# EAGLE board Arm controller (EAGLE 9.2.1)
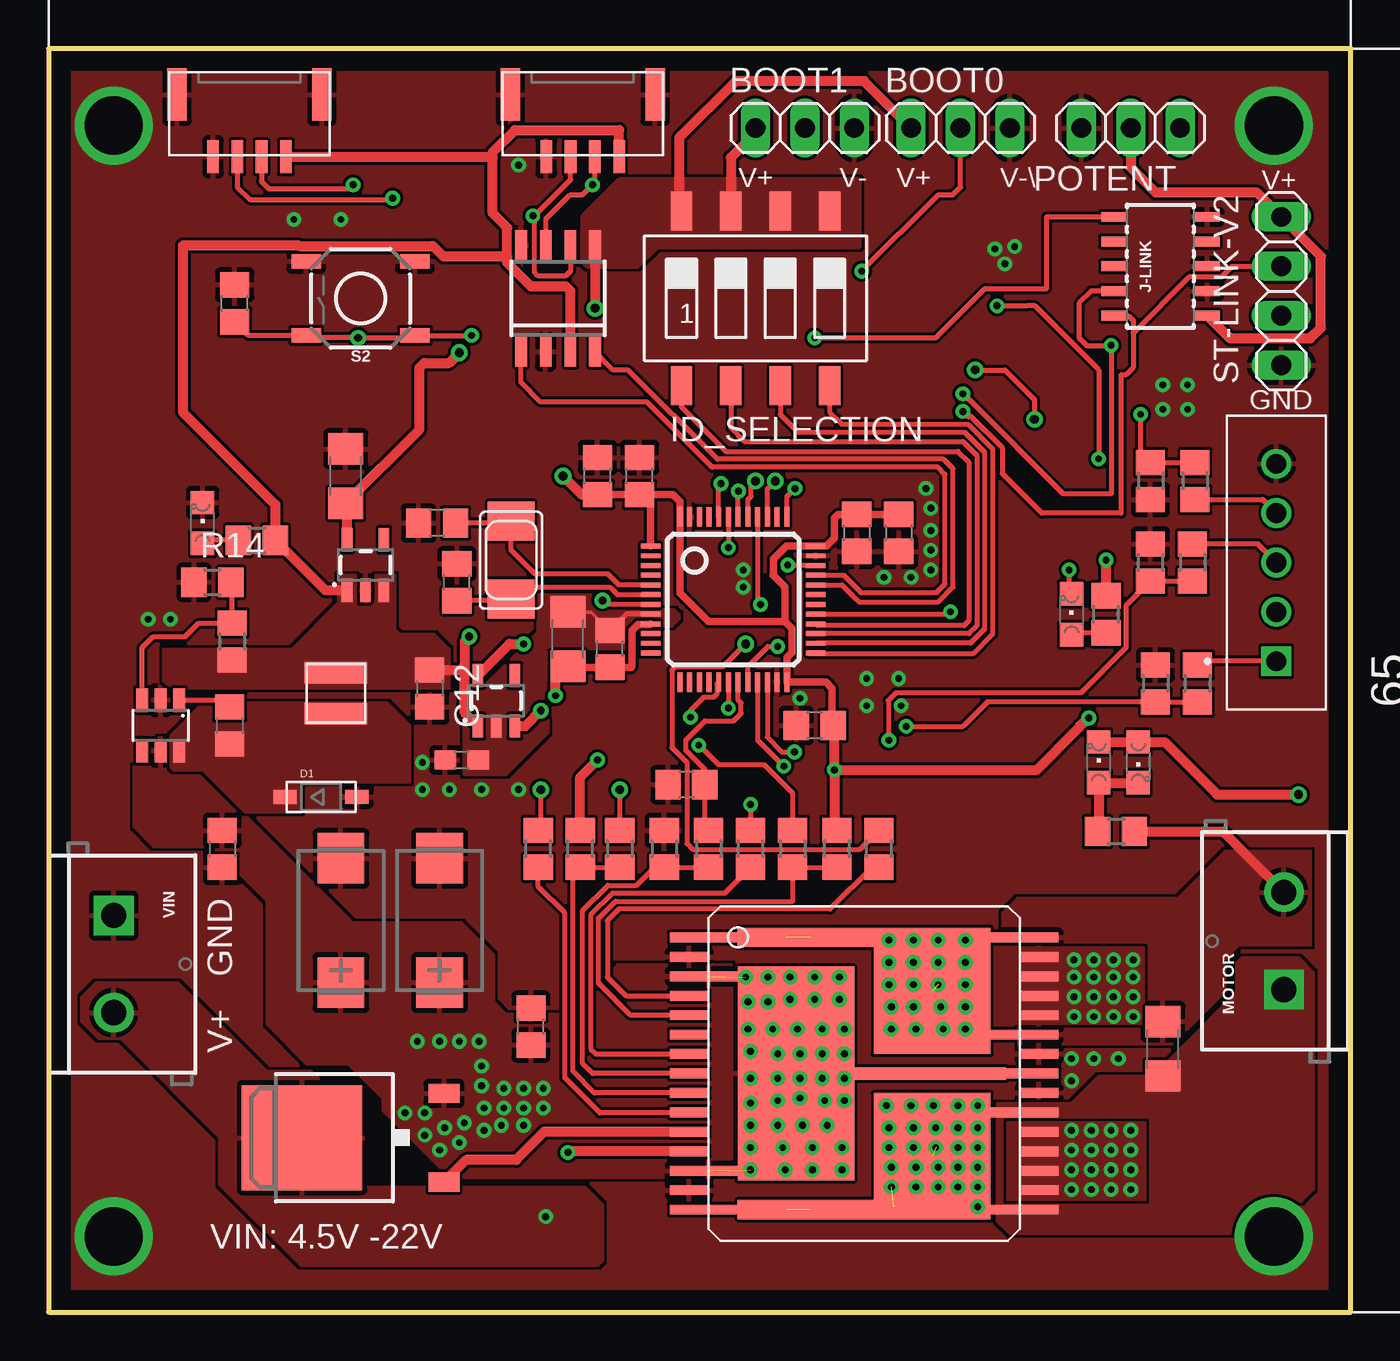
[diagram p0: board, top side]
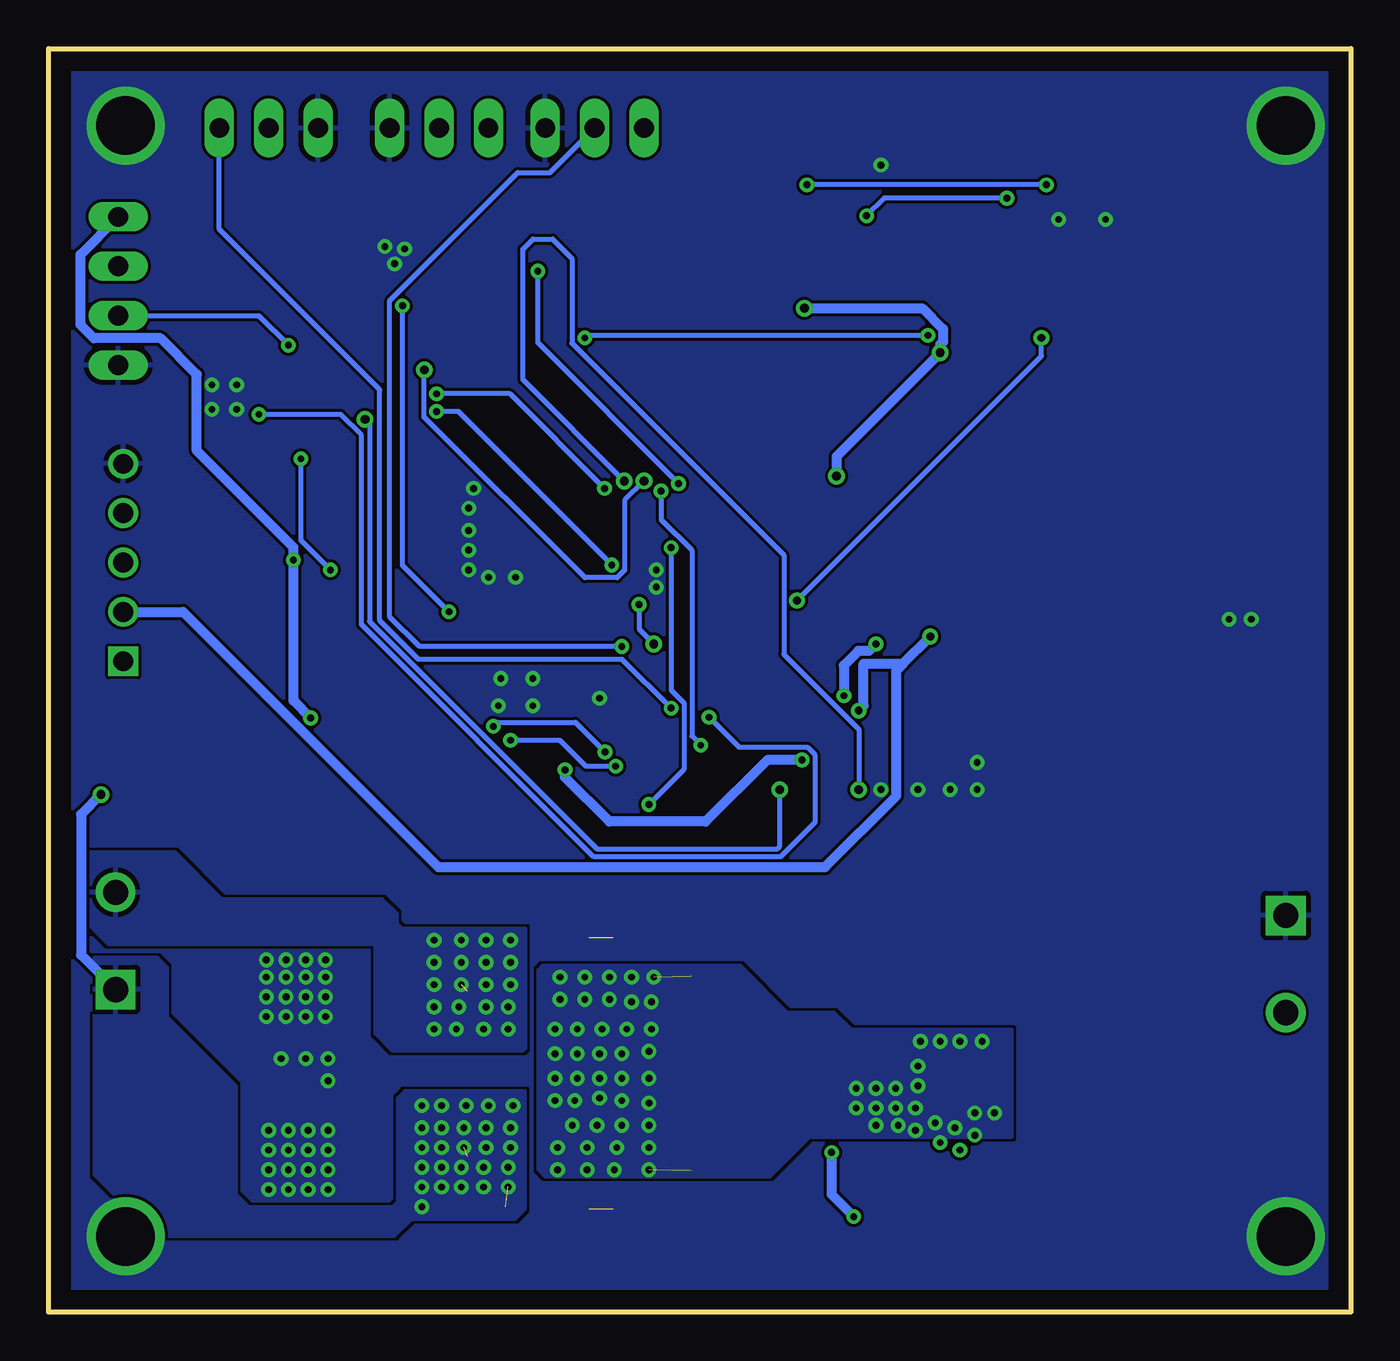
[diagram p1: board, bottom side, seen from below]

Size 67 x 65 mm. Coordinates in mm from the lower left corner, seen from the top.
Outline: 0,0 67,0 67,65 0,65 0,0
Copper layers (1*16): Top 0.035mm / dielectric 1.5mm / Bottom 0.035mm
Design rules "default *": minimum track width 6mil, minimum drill 0.35mm, track to track 6mil, track to pad 6mil, pad to pad 6mil, via to via 6mil, smd to smd 6mil, copper to edge 40mil, drill to drill 6mil, minimum pad ring 10mil, minimum via ring 8mil, stop-mask expansion 4mil, vias tented up to drill 15mil, thermal gap 10mil

## Footprints (pad centres in the part's own frame; a part is rotated, then mirrored left to right if it is on the bottom)
1X03 = drill 1.016 long: 1 -2.54,0; 2 0,0; 3 2.54,0
C0805 = smd 1.3 x 1.5: 1 -0.95,0; 2 0.95,0
C1206 = smd 1.6 x 1.8: 1 -1.4,0; 2 1.4,0
CT7343 = smd 2.6 x 2.4: + -3.2,0; - 3.2,0
SM04B-GHS-TB = smd 0.6 x 1.7: P$1 -1.875,0.85; P$2 -0.625,0.85; P$3 0.625,0.85; P$4 1.875,0.85 | smd 1 x 2.7: P$5 -3.725,-2.35; P$6 3.725,-2.35
SOD-123 = smd 1.2 x 0.7: A 1.85,0; C -1.85,0
0603 = smd 1.1 x 1: 1 -0.85,0; 2 0.85,0
SMS-004 = smd 1.092 x 2.007: 1 -3.81,-4.496; 2 -1.27,-4.496; 3 1.27,-4.496; 4 3.81,-4.496; 5 3.81,4.496; 6 1.27,4.496; 7 -1.27,4.496; 8 -3.81,4.496
TE_5-103669-4 = drill 1.02 square: 1 -5.08,0 | drill 1.02: 2 -2.54,0; 3 0,0; 4 2.54,0; 5 5.08,0
SAMTECH_FTSH-105-01 = smd 0.508 x 1.27: 1 -2.54,-2.413; 2 -2.54,2.413; 3 -1.27,-2.413; 4 -1.27,2.413; 5 0,-2.413; 6 0,2.413; 7 1.27,-2.413; 8 1.27,2.413; 9 2.54,-2.413; 10 2.54,2.413
CHIPLED_0805 = smd 1.2 x 1.2: A 0,-1.05; C 0,1.05
SCREWTERMINAL-5MM-2 = drill 1.3 pad 2.032 square: 1 0,0 | drill 1.3 pad 2.032: 2 5,0
R0805 = smd 1.3 x 1.5: 1 -0.95,0; 2 0.95,0
TACTILE_SWITCH_SMD_5.2MM = smd 1.524 x 0.762: 1 -2.794,1.905; 2 2.794,1.905; 3 -2.794,-1.905; 4 2.794,-1.905
1X04 = drill 1.016 long: 1 -3.81,0; 2 -1.27,0; 3 1.27,0; 4 3.81,0
SOT23-5 = smd 0.55 x 1.2: 1 -0.95,-1.3; 2 0,-1.3; 3 0.95,-1.3; 4 0.95,1.3; 5 -0.95,1.3
STM32_LQFP48 = smd 0.254 x 1: 1 -2.75,-4.25; 2 -2.25,-4.25; 3 -1.75,-4.25; 4 -1.25,-4.25; 5 -0.75,-4.25; 6 -0.25,-4.25; 7 0.25,-4.25; 8 0.75,-4.25; 9 1.25,-4.25; 10 1.75,-4.25; 11 2.25,-4.25; 12 2.75,-4.25; 25 2.75,4.25; 26 2.25,4.25; 27 1.75,4.25; 28 1.25,4.25; 29 0.75,4.25; 30 0.25,4.25; 31 -0.25,4.25; 32 -0.75,4.25; 33 -1.25,4.25; 34 -1.75,4.25; 35 -2.25,4.25; 36 -2.75,4.25 | smd 1 x 0.254: 13 4.25,-2.75; 14 4.25,-2.25; 15 4.25,-1.75; 16 4.25,-1.25; 17 4.25,-0.75; 18 4.25,-0.25; 19 4.25,0.25; 20 4.25,0.75; 21 4.25,1.25; 22 4.25,1.75; 23 4.25,2.25; 24 4.25,2.75; 37 -4.25,2.75; 38 -4.25,2.25; 39 -4.25,1.75; 40 -4.25,1.25; 41 -4.25,0.75; 42 -4.25,0.25; 43 -4.25,-0.25; 44 -4.25,-0.75; 45 -4.25,-1.25; 46 -4.25,-1.75; 47 -4.25,-2.25; 48 -4.25,-2.75
MULTIPOWERSO-30 = smd 0.508 x 12: 1 -7,-4; 15 7,-4; 16 7,4; 30 -7,4 | smd 0.508 x 2: 2 -6,-9; 4 -4,-9; 5 -3,-9; 6 -2,-9; 7 -1,-9; 8 0,-9; 9 1,-9; 10 2,-9; 11 3,-9; 12 4,-9; 14 6,-9; 17 6,9; 18 5,9; 19 4,9; 20 3,9; 22 1,9; 24 -1,9; 26 -3,9; 27 -4,9; 28 -5,9; 29 -6,9 | smd 0.508 x 4: 3 -5,-8; 13 5,-8; 21 2,8; 23 0,8; 25 -2,8 | smd 6.5 x 6: OUTA -4.25,3.5; OUTB 4.25,3.5 | smd 1 x 7.5: OUTA@1 -7,-2.755; OUTB@1 7,-2.755 | smd 11 x 6: VCC 0,-3.5 | smd 0.65 x 8.3: VCC@1 0,3.145
SOIC8 = smd 0.6 x 1.5: 1 -1.905,-2.75; 2 -0.635,-2.75; 3 0.635,-2.75; 4 1.905,-2.75; 5 1.905,2.75; 6 0.635,2.75; 7 -0.635,2.75; 8 -1.905,2.75
TO252-3 = smd 1 x 1.6: 1 -2.28,-6.07; 2 2.28,-6.07 | smd 5.4 x 6.2: 3 0,1.23
TSOT23-6 = smd 0.62 x 1.22: 1 -0.95,-1.3; 2 0,-1.3; 3 0.95,-1.3; 4 0.95,1.3; 5 0,1.3; 6 -0.95,1.3
3015 = smd 1.1 x 3.2: 1 -1.05,0; 2 1.05,0
NX5032 = smd 2 x 2.4: P$1 2,0; P$2 -2,0

## Placement (x,y rotation side)
BOOT0  [1X03]  46.91,60.91 0 top
BOOT1  [1X03]  38.91,60.91 0 top
C1  1uF  [C0805]  41.58,40.09 270 top
C2  1uF  [C0805]  43.74,40.09 270 top
C3  1uF  [C0805]  39.42,30.18 180 top
C4  1uF  [C0805]  28.24,43.01 90 top
C5  100nF  [C0805]  30.4,43.01 90 top
C6  20pF  [C0805]  19.99,40.59 180 top
C7  20pF  [C0805]  21,37.55 90 top
C8  100nF  [C1206]  57.33,13.54 90 top
C9  100nF  [C0805]  24.81,14.68 90 top
C10  10uF  [C1206]  15.29,43.01 90 top
C11  4.7uF  [C0805]  8.94,23.83 270 top
C12  10uF  [C0805]  19.61,32.08 270 top
C13  33nF  [C0805]  32.81,27.13 180 top
C14  10nF  [C0805]  9.32,30.18 270 top
C19  103pF  [C0805]  9.57,51.9 90 top
C20  10uF  [C1206]  26.72,34.62 90 top
C21  1uF  [C0805]  28.88,34.12 90 top
C22  [CT7343]  15.03,20.15 90 top
C23  [CT7343]  20.11,20.15 90 top
CON1  SM04B-GHS-TB  [SM04B-GHS-TB]  27.48,60.28 180 top
CON2  SM04B-GHS-TB  [SM04B-GHS-TB]  10.34,60.28 180 top
D1  [SOD-123]  14.02,26.5 0 top
FB1  30O/1.8A  [0603]  21.26,28.4 0 top
ID_SELECTION  SMS-004  [SMS-004]  36.37,52.15 0 top
J1  5-103669-4  [TE_5-103669-4]  63.17,38.56 90 top
J-LINK  CORTEX_DEBUG_SMD  [SAMTECH_FTSH-105-01]  57.2,53.8 90 top
LED1  [CHIPLED_0805]  54.02,28.27 0 top
LED2  [CHIPLED_0805]  56.05,28.27 180 top
LED3  [CHIPLED_0805]  7.92,40.59 0 top
LED4  [CHIPLED_0805]  52.63,35.89 0 top
MOTOR  [SCREWTERMINAL-5MM-2]  63.55,16.59 90 top
POTENT  [1X03]  55.67,60.91 180 top
R1  1k  [R0805]  10.72,39.7 0 top
R2  1k  [R0805]  31.67,23.83 270 top
R3  4.7k  [R0805]  27.35,23.83 90 top
R4  4.7k  [R0805]  40.56,23.83 90 top
R5  1k  [R0805]  42.72,23.83 90 top
R6  1k  [R0805]  25.19,23.83 90 top
R7  1k  [R0805]  38.27,23.83 270 top
R8  1k  [R0805]  29.38,23.83 270 top
R9  10k  [R0805]  54.91,24.72 180 top
R10  1k  [R0805]  36.12,23.83 90 top
R11  10k  [R0805]  33.96,23.83 270 top
R12  1k  [R0805]  54.4,35.89 90 top
R13  91k  [R0805]  9.45,34.5 270 top
R14  17k  [R0805]  8.43,37.55 0 top
R15  1k  [R0805]  59.1,32.34 270 top
R16  2k  [R0805]  56.94,32.34 270 top
R17  1k  [R0805]  58.85,38.56 270 top
R18  3.3k  [R0805]  56.69,38.56 90 top
R19  1k  [R0805]  58.98,42.75 270 top
R20  2k  [R0805]  56.69,42.75 270 top
S2  TAC_SWITCHSMD  [TACTILE_SWITCH_SMD_5.2MM]  16.05,52.15 180 top
ST-LINK-V2  [1X04]  63.42,52.53 90 top
U1  3.3V  [SOT23-5]  16.3,38.43 0 top
U2  3.3V  [SOT23-5]  23.04,31.45 0 top
U$1  STM32F103CBT6  [STM32_LQFP48]  35.23,36.66 270 top
U$2  VNH5019  [MULTIPOWERSO-30]  41.96,12.27 270 top
U$3  MCP2562-E/SN  [SOIC8]  26.21,52.15 0 top
U$4  MOSFET-NCH  [TO252-3]  14.27,8.97 90 top
U$7  RT6200  [TSOT23-6]  5.76,30.18 180 top
U$8  3015-INDUCTOR  [3015]  14.78,31.83 90 top
VIN  [SCREWTERMINAL-5MM-2]  3.35,20.4 270 top
X1  8MHz  [NX5032]  23.8,38.69 90 top

## Library data of the parts
BOOT0 BOOT1 POTENT ST-LINK-V2 = pinhead
C1-C7 C9 C11-C14 C19 C21-C23 = rcl; SPICEPREFIX: C
C8 C10 C20 = resistor
CON1 CON2 ID_SELECTION U$1-U$4 U$7 = SPEAR
D1 X1 = adafruit
FB1 = SPEAR; PROD_ID: NDUC-13805
J1 = SPEAR; AVAILABILITY: Unavailable; CENTERLINE_PITCH: 2.54 mm[.1 in]; COMMENT: 5-103669-4; DESCRIPTION: 05 MTE HDR SRST LATCH W/HLDWN; EU_ROHS_COMPLIANCE: Compliant; LINK: http://www.te.com/usa-en/product-5-103669-4.html; MF: TE Connectivity; MP: 5-103669-4; NUMBER_OF_POSITIONS: 5; PACKAGE: None; PRICE: None; PRODUCT_TYPE: Connector
J-LINK = SparkFun-Connectors
LED1-LED4 = led
MOTOR VIN = SparkFun-Connectors; SF_SKU: PRT-08432
R1-R20 = rcl; SPICEPREFIX: R
S2 = SPEAR; PROD_ID: SWCH-08247; SF_SKU: COM-08720
U1 U2 = SparkFun-IC-Power; PROD_ID: VREG-12457
U$8 = LCSC

## Nets
1: R4.1 R7.2 U$2.5
2: R3.1 R8.2 U$2.9
3.3V: BOOT0.1 BOOT1.1 C1.1 C2.1 C3.1 C4.1 C5.1 C10.1 ID_SELECTION.5 ID_SELECTION.6 ID_SELECTION.7 ID_SELECTION.8 J-LINK.1 POTENT.2 R3.2 R4.2 R12.2 ST-LINK-V2.4 U1.5 U$1.1 U$1.24 U$1.36 U$1.48 U$3.5
5V: C12.1 CON1.P$1 CON2.P$1 J1.2 R1.2 R13.2 U1.1 U1.3 U2.1 U2.3 U$3.3 U$8.2
A: R17.2 R18.1 U$1.21
AGND: C20.2 C21.2 FB1.2 U2.2 U$1.8
B: R15.2 R16.2 U$1.22
BOOT0: BOOT0.2 U$1.44
BOOT1: BOOT1.2 U$1.20
CAN_RX: U$1.32 U$3.4
CAN_TX: U$1.33 U$3.1
CANH: CON1.P$2 CON2.P$2 U$3.7
CANL: CON1.P$3 CON2.P$3 U$3.6
CS: C13.1 R11.1 U$1.19
ENA: R7.1 U$1.42
ENB: R8.1 U$1.41
GND: BOOT0.3 BOOT1.3 C1.2 C2.2 C3.2 C4.2 C5.2 C6.2 C7.2 C9.2 C10.2 C11.2 C12.2 C13.2 C19.2 C22.- C23.- CON1.P$4 CON1.P$5 CON1.P$6 CON2.P$4 CON2.P$5 CON2.P$6 D1.A FB1.1 J1.5 J-LINK.3 J-LINK.5 J-LINK.9 LED3.C POTENT.3 R2.1 R14.1 R16.1 R18.2 R20.2 S2.3 S2.4 ST-LINK-V2.1 U1.2 U$1.23 U$1.35 U$1.47 U$2.2 U$2.14 U$2.17 U$2.18 U$2.19 U$2.20 U$2.22 U$2.24 U$2.26 U$2.27 U$2.28 U$2.29 U$3.2 U$3.8 U$7.2 VIN.1
INA: R5.2 U$1.40
INB: R6.2 U$1.39
INDEX: R19.1 R20.1 U$1.17
LED: LED4.C U$1.29
N$1: C6.1 U$1.5 X1.P$1
N$2: C7.1 U$1.6 X1.P$2
N$3: LED1.A LED2.C R9.2
N$4: C14.1 U$7.1
N$5: LED4.A R12.1
N$6: C14.2 D1.C U$7.6 U$8.1
N$7: J1.1 R15.1
N$8: R13.1 R14.2 U$7.3
N$9: R5.1 U$2.4
N$10: R2.2 R11.2 U$2.8
N$11: J1.3 R17.1
N$12: R6.1 U$2.10
N$14: U$2.11 U$4.1
N$15: J1.4 R19.2
N$20: R10.1 U$2.7
N$22: LED3.A R1.1
NODE1: ID_SELECTION.1 U$1.28
NODE2: ID_SELECTION.2 U$1.27
NODE3: ID_SELECTION.3 U$1.26
NODE4: ID_SELECTION.4 U$1.25
OUTA: C8.2 MOTOR.2 R9.1 U$2.1 U$2.25 U$2.30 U$2.OUTA U$2.OUTA@1
OUTB: C8.1 LED1.C LED2.A MOTOR.1 U$2.15 U$2.16 U$2.21 U$2.OUTB U$2.OUTB@1
POTENT: POTENT.1 U$1.18
PWM: R10.2 U$1.43
RST: C19.1 J-LINK.10 S2.1 S2.2 U$1.7
SWDCLK: J-LINK.4 ST-LINK-V2.2 U$1.37
SWDIO: J-LINK.2 ST-LINK-V2.3 U$1.34
VCC: C20.1 C21.1 U2.5 U$1.9
VIN: U$2.12 U$4.3 VIN.2
VOUT: C9.1 C11.1 C22.+ C23.+ U$2.3 U$2.13 U$2.23 U$2.VCC U$2.VCC@1 U$4.2 U$7.5

## Tracks (layer width: path | path; a pad name or v marks a point on that pad's centre or on a via)
1
  Top 0.254: U$2.5 29.94,15.27 28.29,16.92 28.29,20.26 29.17,21.14 38.27,21.14 R7.2 R4.1
2
  Top 0.254: U$2.9 28.1,11.27 26.97,12.4 26.97,22.5 R3.1 R8.2
3.3V  (via drill 0.35, 0.45)
  Top 0.381: C2.1 C1.1 40.62,41.03 40.43,40.85 40.43,39.83 40.01,39.41 U$1.36 37.97,39.41 37.3,38.73 37.3,37.97 37.26,37.93 37.89,37.29 37.89,35.51 | 30.53,42.06 C5.1 C4.1 | 30.53,42.06 32.11,42.06 32.48,41.69 U$1.48 32.48,36.99 33.96,35.51 37.89,35.51 | U$1.1 30.98,41.61 30.53,42.06 | 37.89,35.51 38.23,35.17 38.23,33.94 37.98,33.68 U$1.24 39.98,32.41 40.31,32.08 40.31,30.24 C3.1
  Top 0.508: U1.5 15.35,41.54 C10.1 19.09,45.4 19.09,48.58 19.32,48.82 20.6,48.82 v21.13,49.36 | BOOT1.1 36.37,60.66 35.1,59.39 ID_SELECTION.7 | BOOT0.1 41.96,63.33 35.35,63.33 32.43,60.41 32.43,56.77 ID_SELECTION.8 | v26.46,43.01 27.41,42.06 C4.1 | U$3.5 v28.11,51.64 | R3.2 27.35,27.51 v28.24,28.4 | v40.43,27.89 40.43,24.91 R4.2 | v40.43,27.89 40.43,30.11 C3.1 | v40.43,27.89 50.85,27.89 53.02,30.06 53.02,30.09 53.26,30.33 53.28,30.33 v53.52,30.56 | v54.4,38.69 R12.2 | POTENT.2 55.67,58.88 56.94,57.61 62.15,57.61 ST-LINK-V2.4 65.45,54.31 65.45,50.63 64.92,50.09 60.78,50.09 J-LINK.1
  Bottom 0.508: v26.46,43.01 26.46,44.02 v21.13,49.36 21.13,49.77 20.98,49.92 20.98,50.57 22.05,51.64 v28.11,51.64 | v28.24,28.4 30.02,28.4 33.2,25.23 38.15,25.23 40.43,27.51 v40.43,27.89 | v53.52,30.56 54.4,31.45 v54.4,38.69 54.4,39.33 59.38,44.31 59.38,48.24 61.24,50.09 64.67,50.09 65.35,50.78 65.35,54.41 ST-LINK-V2.4
  pour Top (no thermals): 27.48,56.34 27.48,54.05 27.73,53.8 30.27,53.8 31.29,54.82 41.7,54.82 41.7,58.25 29.38,58.25
5V  (via drill 0.4)
  Top 0.508: U2.1 21.4,30.83 21.4,32.85 21.4,33.23 | U2.3 24.53,30.15 v25.32,30.94 | v21.64,34.75 21.4,34.52 21.4,33.23 | U$3.3 26.84,52.53 26.62,52.76 24.82,52.76 23.6,53.98 23.6,54.31 | 23.6,54.31 23.6,55.78 22.85,56.52 22.85,59.39 | U1.1 14.24,37.13 R1.2 11.67,41.55 6.91,46.31 6.91,54.87 12.85,54.87 12.88,54.84 19.77,54.84 20.31,54.31 23.6,54.31 | CON1.P$1 29.35,60.81 23.99,60.81 22.85,59.67 22.85,59.39 | CON2.P$1 22.81,59.43 22.85,59.39 | C12.1 21.21,33.03 21.4,33.23
  Bottom 0.508: v25.32,30.94 25.07,31.2 25.07,33.35 23.04,33.35 | 23.04,33.35 v21.64,34.75 | J1.2 60.09,36.02 46.95,22.89 27.06,22.89 23.39,26.55 23.39,33 23.04,33.35
  pour Top (no thermals): 5.89,34.12 5.89,32.47 6.27,32.08 20.62,32.08 20.62,34.12 19.86,34.88 18.08,34.88 17.83,35.13 17.83,37.93 16.81,37.93 16.81,36.53 16.56,36.27 15.92,36.27 15.8,36.4 15.8,37.93 14.91,37.93 14.91,36.53 12.49,34.12
A  (via drill 0.35)
  Top 0.254: U$1.21 36.48,29.43 v37.83,28.08 | v43.23,29.42 43.2,29.44 43.2,31.47 43.59,31.85 53.11,31.85 55.43,34.18 55.43,36.35 R18.1 R17.2
  Bottom 0.254: v37.83,28.08 39.35,28.08 40.69,29.42 v43.23,29.42
AGND
  Top 0.152: C20.2 27.92,36.02 C21.2
  Top 0.254: U$1.8 29.72,35.91 C21.2
  pour Top (no thermals): 25.19,36.91 27.99,36.91 28.75,36.15 32.05,36.15 32.18,36.15 32.43,35.89 32.43,35.64 32.31,35.51 32.05,35.26 30.15,35.26 29.89,35.01 29.89,34.12 25.96,34.12 25.7,33.86 25.7,32.08 25.7,29.8 23.54,27.64 21.38,27.64 21.38,31.2 24.3,34.12 25.19,35.01
B  (via drill 0.35)
  Top 0.254: U$1.22 36.98,29.57 37.74,28.81 v38.38,28.81 | v44.12,30.13 47.04,30.13 48.3,31.39 R16.2 58.98,31.39
  Top 0.508: R15.2 58.98,31.39
  Bottom 0.254: v38.38,28.81 39.9,30.33 43.92,30.33 v44.12,30.13
BOOT0  (via drill 0.35)
  Top 0.254: U$1.44 34.48,42.51 v34.59,42.62 | v41.83,53.55 45.77,57.48 46.53,57.48 46.91,57.87 BOOT0.2
  Bottom 0.254: v34.59,42.62 41.83,49.86 v41.83,53.55
BOOT1  (via drill 0.35)
  Top 0.254: U$1.20 35.98,33.22 37,34.24 v37.51,34.24
  Bottom 0.254: BOOT1.2 41.2,58.63 42.87,58.63 49.45,52.04 49.45,35.77 47.92,34.24 v37.51,34.24
CAN_RX
  Top 0.254: U$1.32 40.83,37.41 41.39,36.85 41.7,36.53 45.77,36.53 46.53,37.29 46.53,43.39 46.4,43.51 46.05,43.87 34.4,43.87 29.8,48.47 29.05,48.47 U$3.4
CAN_TX
  Top 0.254: U$1.33 40.9,37.91 41.8,37.01 45.67,37.01 46.12,37.46 46.12,43.09 45.75,43.46 34.13,43.46 30.78,46.82 25.32,46.82 24.3,47.83 U$3.1
CANH  (via drill 0.35)
  Top 0.254: U$3.7 25.57,56.21 26.84,57.47 27.47,57.47 27.86,57.87 | CON2.P$2 10.96,58.16 11.34,57.78 15.45,57.78 v15.67,57.99 | 27.86,57.87 v27.99,57.99 28.11,58.11 | 28.11,58.11 27.86,57.87 | 28.11,58.11 CON1.P$2
  Bottom 0.254: v15.67,57.99 v27.99,57.99
CANL  (via drill 0.35)
  Top 0.254: U$3.6 26.84,53.55 26.59,53.29 25.19,53.29 25,53.49 25,56.4 | CON1.P$3 26.86,58.26 26.3,57.7 25,56.4 | CON2.P$3 9.71,57.85 10.34,57.23 17.62,57.23 v17.7,57.31 | v24.92,56.4 25,56.4
  Bottom 0.254: v17.7,57.31 24.01,57.31 v24.92,56.4
CS
  Top 0.254: R11.1 33.76,24.97 C13.1 33.76,27.92 32.79,28.89 32.79,29.44 33.77,30.41 35.24,30.41 35.63,30.8 35.63,31.34 35.48,31.49 U$1.19
ENA  (via drill 0.35)
  Top 0.254: U$1.42 35.48,42.23 v35.49,42.24 | v33.45,29.16 34.45,28.16 36.82,28.16 38.27,26.7 R7.1
  Bottom 0.254: v35.49,42.24 35.48,42.23 35.48,40.76 33.91,39.19 33.91,29.62 v33.45,29.16
ENB  (via drill 0.45)
  Top 0.254: U$1.41 35.98,41.8 36.15,41.96 36.15,42.53 v36.37,42.76 | v47.67,48.47 49.2,48.47 50.72,46.94 v50.72,45.93 | v29.38,26.88 R8.1
  Bottom 0.254: v47.67,48.47 47.7,48.44 47.7,46.06 39.41,37.78 37.75,37.78 37.36,38.16 37.36,41.76 v36.37,42.76 | v50.72,45.93 50.49,45.7 50.49,35.53 38.79,23.83 29.51,23.83 29.38,23.96 v29.38,26.88
GND  (via drill 0.35, 3)
  other vias: 52.75,17.23 53.77,17.23 52.75,16.21 53.77,16.21 52.75,15.19 53.77,15.19 52.63,9.35 53.64,9.35 54.66,9.35 55.67,9.35 52.63,8.34 53.64,8.34 54.66,8.34 55.67,8.34 52.63,7.32 53.64,7.32 54.66,7.32 55.67,7.32 3.35,61.04 63.04,61.04 63.04,3.89 3.35,3.89 52.75,18.11 53.77,18.11 54.78,18.11 55.8,18.11 54.78,17.23 55.8,17.23 55.8,16.21 54.78,16.21 54.78,15.19 55.8,15.19 52.63,6.3 53.64,6.3 54.66,6.3 55.67,6.3 45.39,41.35 45.39,39.2 42.09,32.59 43.74,32.59 43.86,31.2 42.09,31.2 5.13,35.64 6.27,35.64 24.18,26.88 22.27,26.88 19.23,28.27 19.23,26.88 20.62,26.88 48.69,54.69 57.33,47.7 49.7,54.82 49.2,53.93 57.33,46.44 58.59,46.44 35.73,37.29 35.73,38.18 52.63,13.03 53.77,13.03 55.04,13.03 52.63,11.89 12.62,56.21 15.03,56.21 24.18,59.01 45.39,40.21 45.39,38.18 44.37,37.8 42.97,37.8 45.13,42.37 38.66,31.58 58.59,47.7
  pour Top (rank 4): -3,64.98 -3,-5 -2.87,-5.13 66.98,-5.13 67.1,-5.25 67.1,64.85 66.98,64.98
  pour Bottom (rank 5): -3.38,65.23 -3.38,-5.51 67.36,-5.51 67.48,-5.63 67.48,65.23
  pour Top (no thermals): 49.45,18.75 56.31,18.75 56.31,14.81 49.45,14.81
  pour Top (no thermals): 49.32,9.73 49.32,5.79 56.44,5.79 56.44,9.73
INA  (via drill 0.35, 0.45)
  Top 0.254: U$1.40 36.48,36.55 v36.62,36.4 | v35.86,34.37 34.68,33.19 32.23,33.19 32.07,33.02 32.07,29.04 32.84,28.27 32.84,24.11 33.13,23.81 41.75,23.81 R5.2
  Bottom 0.254: v36.62,36.4 36.62,35.13 v35.86,34.37
INB  (via drill 0.45)
  Top 0.254: U$1.39 36.98,42.34 v37.39,42.75 | v25.32,26.88 25.32,24.91 R6.2
  Bottom 0.254: v37.39,42.75 42.59,47.96 42.59,54.69 42.09,55.2 41.07,55.2 40.08,54.2 40.08,49.85 29.18,38.95 29.18,33.83 25.32,29.98 v25.32,26.88
INDEX  (via drill 0.35)
  Top 0.254: v33.03,30.6 33.03,30.96 33.7,31.63 34.22,31.63 34.38,31.79 34.38,32.31 U$1.17 | v56.18,46.18 56.18,44.21 R20.1 R19.1
  Bottom 0.254: v56.18,46.18 51.98,46.18 50.9,45.1 50.9,35.36 38.96,23.42 29.34,23.42 27.58,25.18 27.58,28.67 27.97,29.06 31.48,29.06 v33.03,30.6
LED  (via drill 0.35)
  Top 0.254: U$1.29 46.29,35.91 v46.4,36.02 | v48.79,51.77 50.32,51.77 50.73,51.77 54.02,48.48 v54.02,43.9 | v52.5,38.18 52.5,37.07 LED4.C
  Bottom 0.254: v46.4,36.02 48.79,38.41 v48.79,51.77 | v54.02,43.9 54.02,39.7 v52.5,38.18
N$1
  Top 0.254: U$1.5 29.34,37.41 28.77,37.97 25.03,37.97 23.8,39.2 X1.P$1 23.7,40.59 C6.1
N$2
  Top 0.254: U$1.6 29.26,36.91 28.88,37.29 24.4,37.29 X1.P$2 23.7,36.59 C7.1
N$3
  Top 0.508: R9.2 54.02,24.78 LED1.A LED2.C
N$4
  Top 0.254: U$7.1 8.97,31.48 C14.1
N$5
  Top 0.254: R12.1 52.73,34.94 LED4.A
N$6
  pour Top (no thermals): 13,25.73 13,27.13 13.13,27.26 18.59,27.26 18.59,30.18 17.45,31.32 7.92,31.32 6.27,29.67 6.27,28.02 6.4,27.89 7.92,27.89 10.08,25.73
N$7
  Top 0.254: J1.1 59.3,33.48 R15.1
N$8
  Top 0.254: R14.2 9.45,37.48 R13.1 7.73,35.45 7.03,34.75 5.38,34.75 4.81,34.18 U$7.3
N$9
  Top 0.254: R5.1 42.36,22.88 40.21,20.73 29.34,20.73 28.75,20.14 28.75,17.22 29.7,16.27 U$2.4
N$10
  Top 0.254: U$2.8 27.99,12.27 27.48,12.78 27.48,20.65 28.78,21.95 30.25,21.95 31.18,22.88 R2.2 R11.2
N$11
  Top 0.254: J1.3 62.22,39.51 R17.1
N$12
  Top 0.254: U$2.10 32.93,10.24 28.37,10.24 26.57,12.04 26.57,20.53 25.19,21.9 R6.1
N$14
  Top 0.508: U$2.11 25.5,9.27 24.05,7.83 21.48,7.83 U$4.1
N$15
  Top 0.254: R19.2 62.47,41.8 J1.4
N$20
  Top 0.254: R10.1 34.78,21.54 29,21.54 27.89,20.43 27.89,13.54 28.16,13.27 U$2.7
N$22
  Top 0.254: R1.1 8.08,39.7 LED3.A
NODE1
  Top 0.254: ID_SELECTION.1 32.56,46.56 34.85,44.28 46.78,44.28 47.34,43.72 47.34,35.56 47.09,35.31 39.57,35.31 U$1.28
NODE2
  Top 0.254: ID_SELECTION.2 35.1,45.49 35.81,44.78 47.03,44.78 47.75,44.07 47.75,35.3 47.35,34.91 U$1.27
NODE3
  Top 0.254: ID_SELECTION.3 37.64,46.18 38.55,45.27 47.12,45.27 48.16,44.23 48.16,35.13 47.43,34.41 U$1.26
NODE4
  Top 0.254: ID_SELECTION.4 40.18,46.31 40.81,45.67 47.29,45.67 48.56,44.4 48.56,34.88 47.55,33.86 39.14,33.86 39.18,33.91 U$1.25
OUTA  (via drill 0.35)  (2 unrouted)
  Top 0.381: v43.23,19.13 43.09,19.27 U$2.1 32.96,19.27 32.94,19.26 44.37,19.26 v44.5,19.13
  Top 0.508: R9.1 60.42,24.72 MOTOR.2
  other vias: 45.77,19.13 47.16,19.13 47.16,17.99 45.77,17.99 44.5,17.99 43.23,17.99 43.23,16.84 44.5,16.84 45.77,16.84 47.16,16.84 47.16,15.7 45.9,15.7 44.5,15.7 43.35,15.7 43.35,14.56 44.62,14.56 46.02,14.56 47.16,14.56
  pour Top (rank 2): 49.07,13.8 57.83,13.8 60.5,16.46 60.5,18.11 61.26,18.88 64.94,18.88 64.94,23.7 60.5,23.7 58.09,21.29 49.83,21.29 49.07,20.53
  pour Bottom (rank 3): 42.47,19.77 42.47,13.54 42.59,13.41 49.32,13.41 50.21,14.3 50.21,18.88 63.93,18.88 64.94,19.89 64.94,23.7 60.5,23.7 58.09,21.29 49.83,21.29 49.07,20.53 49.07,20.02 48.82,19.77
OUTB  (via drill 0.35, 0.45)  (3 unrouted)
  Top 0.254: U$2.OUTB@1 43.34,5.27 43.48,5.41
  Top 0.508: LED1.C LED2.A 57.42,29.32 60.12,26.62 v64.31,26.62
  Bottom 0.508: v64.31,26.62 65.33,25.61 65.33,18.37 MOTOR.1
  other vias: 43.1,10.62 44.37,10.62 45.51,10.62 46.78,10.62 47.8,10.62 47.8,9.48 46.78,9.48 45.64,9.48 44.5,9.48 43.23,9.48 43.23,8.46 44.5,8.46 45.64,8.46 46.78,8.46 47.8,8.46 47.8,7.45 46.78,7.45 45.77,7.45 44.62,7.45 43.35,7.45 43.35,6.43 44.62,6.43 45.77,6.43 46.78,6.43 47.8,6.43 47.8,5.41
  pour Top (rank 2, no thermals): 48.82,10.75 52.63,10.75 54.02,12.14 56.82,12.14 58.34,13.67 61.14,16.46 61.14,17.99 61.39,18.24 64.31,18.24 65.07,17.48 65.07,14.43 65.07,6.3 63.93,5.16 62.79,4.02 49.45,4.02 48.82,4.65
  pour Bottom (rank 3): 42.47,11.38 48.69,11.38 49.07,11 49.07,5.67 49.32,5.41 56.69,5.41 57.33,6.05 57.33,11.64 60.88,15.19 60.88,17.73 61.39,18.24 64.69,18.24 64.69,7.06 61.52,3.89 49.2,3.89 48.31,4.78 42.97,4.78 42.47,5.29
POTENT  (via drill 0.35)
  Top 0.254: U$1.18 v34.98,31.07 v34.97,31.07
  Bottom 0.254: v34.97,31.07 37.49,33.58 47.97,33.58 49.96,35.57 49.96,47.45 58.21,55.71 POTENT.1
PWM  (via drill 0.35)
  Top 0.254: U$1.43 v34.98,39.33 v34.97,39.32 | v36.12,26.11 R10.2
  Bottom 0.254: v34.97,39.32 34.97,32 34.31,31.34 34.31,27.92 v36.12,26.11
RST  (via drill 0.35, 0.4)
  Top 0.254: U$1.7 28.7,36.41 v28.5,36.61 | C19.1 10.27,50.24 S2.2 13.38,50.12 v15.92,50.12 18.72,50.12 S2.1 v21.77,50.24 | v39.42,50.12 45.64,50.12 48.18,52.66 51.36,52.66 51.36,56.34 J-LINK.10
  Bottom 0.254: v28.5,36.61 15.92,49.18 v15.92,50.12 | v21.77,50.24 39.29,50.24 v39.42,50.12
SWDCLK  (via drill 0.35)
  Top 0.254: U$1.37 37.98,41.95 v38.4,42.37 | v47.04,47.24 47.29,46.99 47.31,46.99 52.18,42.12 54.68,42.12 54.68,49.71 | 54.68,49.71 v54.66,49.74 | J-LINK.4 53.64,52.53 53.01,51.9 53.01,50.12 53.41,49.71 54.68,49.71
  Bottom 0.254: v38.4,42.37 43.27,47.24 v47.04,47.24 | ST-LINK-V2.2 56.18,51.26 v54.66,49.74
SWDIO  (via drill 0.35)
  Top 0.254: U$1.34 38.05,38.41 v38.02,38.43 | v47.04,46.33 47.29,46.08 47.46,46.08 49.07,44.47 49.07,43.13 51.1,41.1 55.17,41.1 55.17,48.21 55.42,48.21 55.8,48.59 55.8,50.37 | 54.91,51.13 J-LINK.2 55.55,51.26 55.8,51.01 55.8,50.37 | 55.8,50.37 58.7,53.27 60.36,53.27 60.9,53.8 ST-LINK-V2.3
  Bottom 0.254: v38.02,38.43 45.92,46.33 v47.04,46.33
VCC  (via drill 0.35)
  Top 0.381: U$1.9 30.95,35.38 30.34,35.38 30.02,35.06 30.02,33.23 29.96,33.17 C21.1 26.78,33.17 C20.1
  Top 0.508: U2.5 23.71,34.37 v24.43,34.37 | v26.08,31.7 26.08,32.47 26.78,33.17
  Bottom 0.508: v24.43,34.37 24.79,34.01 25.34,34.01 26.08,33.27 v26.08,31.7
VIN  (via drill 0.35)
  Top 0.508: U$2.12 26.78,8.27 v26.72,8.21
  Bottom 0.508: v26.72,8.21 26.72,6.05 v25.57,4.91
  pour Top: 2.46,16.97 6.65,16.97 11.22,12.4 13.51,12.4 16.18,9.73 16.18,6.43 27.61,6.43 28.5,5.54 28.5,2.62 28.24,2.37 13,2.37 8.81,6.56 8.81,8.97 3.73,14.05 2.59,14.05 1.7,14.94 1.7,16.21
VOUT  (via drill 0.35)  (2 unrouted)
  Top 0.152: U$2.23 45.26,12.27 | 45.26,12.27 41.2,12.27 | 41.2,12.27 v40.94,12.02 41.2,12.27 | 45.26,12.27 U$2.VCC@1 41.2,12.27
  other vias: 18.97,13.92 20.11,13.92 21.13,13.92 22.15,13.92 22.27,12.65 22.27,11.64 22.4,10.49 23.29,9.61 24.43,9.61 23.42,10.49 24.43,10.49 24.43,11.51 23.42,11.51 35.86,17.23 37.01,17.23 38.15,17.23 39.42,17.23 40.69,17.23 40.69,16.08 39.42,16.08 38.15,16.08 37.01,15.95 35.99,15.95 35.99,14.56 37.26,14.56 38.53,14.56 39.8,14.56 40.94,14.56 40.94,13.29 39.8,13.29 38.66,13.29 37.51,13.29 36.12,13.41 36.12,12.02 37.51,12.02 38.66,12.02 39.8,12.02 40.94,10.88 39.93,10.88 38.66,11 37.51,10.88 36.12,10.75 36.12,9.61 37.51,9.61 38.78,9.61 40.05,9.61 36.12,8.46 37.77,8.46 39.29,8.46 40.81,8.46 40.81,7.32 39.29,7.32 37.89,7.32 36.12,7.32 25.45,11.51 25.45,10.49 18.34,10.24 19.35,10.24 19.35,9.1 20.11,8.34 20.37,9.48 21.13,8.72 22.4,9.35 21.38,9.73
  pour Top (rank 2): 4.37,29.54 4.37,24.97 5.38,23.96 8.43,23.96 11.22,21.16 11.22,14.81 13.26,12.78 15.41,12.78 17.19,11 17.19,10.37 20.62,6.94 35.23,6.94 40.31,12.02 40.31,15.45 37.89,17.86 29.26,17.86 26.72,15.32 23.54,15.32 22.91,15.95 22.91,18.37 21.26,20.02 15.67,20.02 6.14,29.54
  pour Bottom (rank 4): 17.45,8.97 27.86,8.97 29.89,6.94 41.45,6.94 41.83,7.32 41.83,17.61 41.58,17.86 31.42,17.86 29,15.45 26.59,15.45 25.7,14.56 17.45,14.56

## Text on the board
tPlace: V+ | V- | V+ | V-\ | V+ | GND
tNames: GND | V+ | VIN: 4.5V -22V